# EAGLE board Muhammad Arya Widiantoro_Supply (Line Follower) (EAGLE 9.6.2)
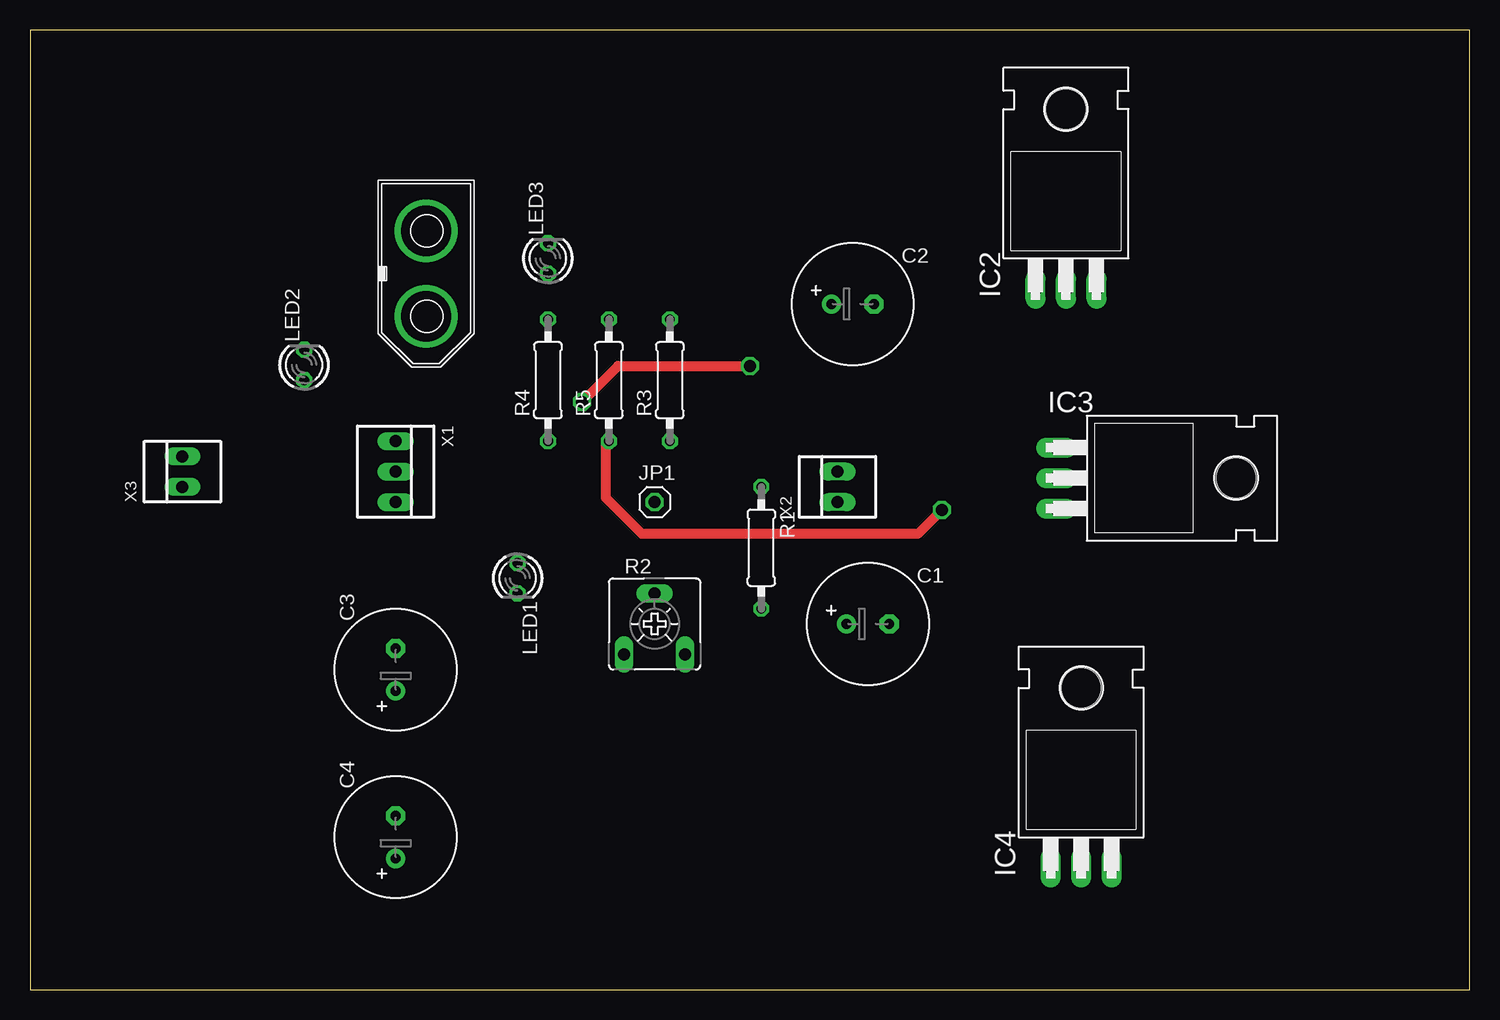
[diagram p0: board, top side]
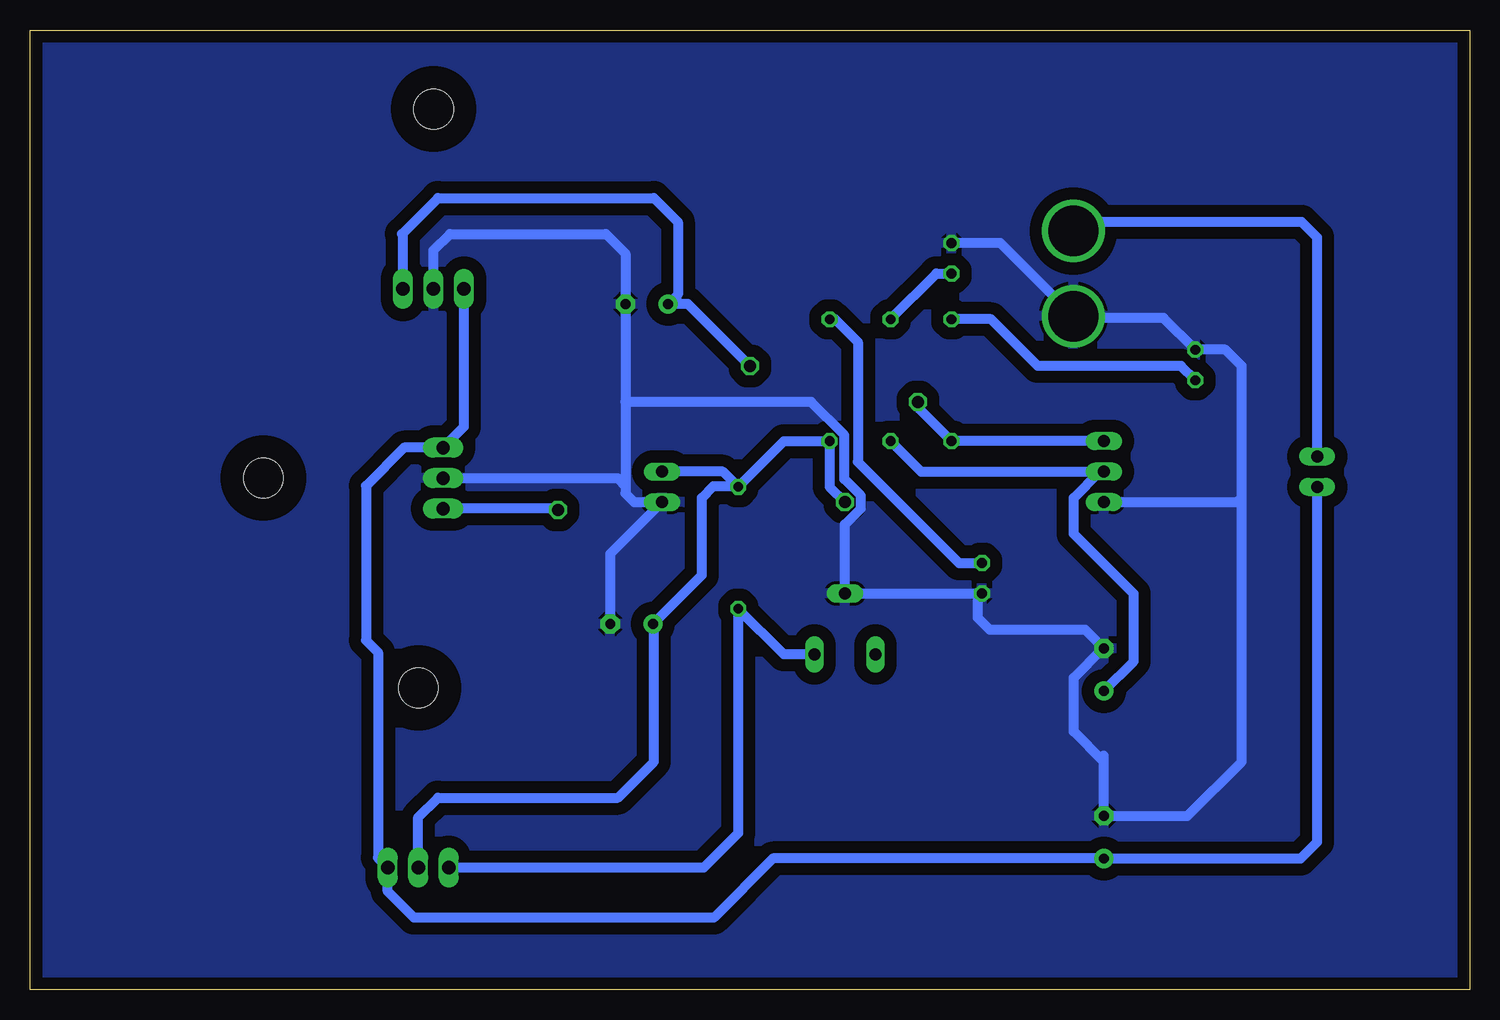
[diagram p1: board, bottom side, seen from below]

Size 120 x 80 mm. Coordinates in mm from the lower left corner, seen from the top.
Outline: 0,0 120,0 120,80 0,80 0,0
Copper layers (1*16): Top 0.035mm / dielectric 1.5mm / Bottom 0.035mm
Design rules "default": minimum track width 6mil, minimum drill 0.35mm, track to track 6mil, track to pad 6mil, pad to pad 6mil, via to via 6mil, smd to smd 6mil, copper to edge 40mil, drill to drill 6mil, minimum pad ring 10mil, minimum via ring 8mil, stop-mask expansion 4mil, vias tented up to drill 0mil, thermal gap 10mil

## Footprints (pad centres in the part's own frame; a part is rotated, then mirrored left to right if it is on the bottom)
E3,5-10 = drill 0.813 pad 1.6: + -1.778,0 | drill 0.813 pad 1.6 octagon: - 1.778,0
TO220H = drill 1.118 long: 1 -2.54,-10.16; 2 0,-10.16; 3 2.54,-10.16 | hole 3.302: 0,4.826
1X01 = drill 1.016 octagon: 1 0,0
LED3MM = drill 0.813 octagon: A -1.27,0; K 1.27,0
0207/10 = drill 0.813 octagon: 1 -5.08,0; 2 5.08,0
CA6V = drill 1.016 long: A -2.54,-2.54; E 2.54,-2.54; S 0,2.54
CON-XT60M = drill 4.2: V+ -3.55,0; V- 3.55,0
22-23-2031 = drill 1 long: 1 -2.54,0; 2 0,0; 3 2.54,0
22-23-2021 = drill 1 long: 1 -1.27,0; 2 1.27,0

## Placement (x,y rotation side)
C1  1000uF/16V  [E3,5-10]  69.85,30.48 0 top
C2  1000uF/16V  [E3,5-10]  68.58,57.15 0 top
C3  1000uF/16V  [E3,5-10]  30.48,26.67 90 top
C4  1000uF/16V  [E3,5-10]  30.48,12.7 90 top
IC2  7805T  [TO220H]  86.36,68.58 0 top
IC3  7805T  [TO220H]  95.72,42.64 270 top
IC4  317T  [TO220H]  87.63,20.32 0 top
JP1  [1X01]  52.07,40.64 0 top
LED1  [LED3MM]  40.64,34.29 270 top
LED2  [LED3MM]  22.86,52.07 90 top
LED3  [LED3MM]  43.18,60.96 90 top
R1  1K2  [0207/10]  60.96,36.83 270 top
R2  20K  [CA6V]  52.07,30.48 0 top
R3  1K  [0207/10]  53.34,50.8 90 top
R4  1K  [0207/10]  43.18,50.8 90 top
R5  1K  [0207/10]  48.26,50.8 90 top
VIN  [CON-XT60M]  33.02,59.69 270 top
X1  VSYS  [22-23-2031]  30.48,43.18 270 top
X2  VMOT  [22-23-2021]  67.31,41.91 90 top
X3  switch  [22-23-2021]  12.7,43.18 90 top

## Library data of the parts
C1-C4 R1 R3-R5 = rcl
IC2-IC4 = linear
JP1 = pinhead
LED1-LED3 = led
R2 = pot
VIN = con-XT60M
X1 = con-molex; MF: MOLEX; MPN: 22-23-2031; OC_FARNELL: 1462950; OC_NEWARK: 30C0862
X2 X3 = con-molex; MF: MOLEX; MPN: 22-23-2021; OC_FARNELL: 1462926; OC_NEWARK: 25C3832

## Nets
+12V: C3.+ IC3.3 R5.1 X1.2
GND: C1.- C2.- C3.- C4.- IC2.2 IC3.2 LED1.K LED2.K LED3.K R2.S VIN.V- X1.3 X2.1
N$1: IC4.1 R1.2 R2.E
N$2: LED1.A R3.2
N$3: LED3.A R5.2
N$4: VIN.V+ X3.2
N$5: LED2.A R4.2
VCC: C2.+ IC2.3 R4.1 X1.1
VDD: C1.+ IC4.2 JP1.1 R1.1 R3.1 X2.2
VPP: C4.+ IC2.1 IC3.1 IC4.3 X3.1

## Tracks (layer width: path | path; a pad name or v marks a point on that pad's centre or on a via)
+12V  (via drill 1)
  Top 0.813: v76,40 74,38 51,38 48,41 48,45.46 R5.1
  Bottom 0.813: 30.82,43.18 33,41 33,38 28,33 28,27.37 C3.+ | 30.82,43.18 X1.2 | R5.1 45.72,43.18 30.82,43.18 | IC3.3 76.1,40.1 v76,40
GND
  Bottom 0.813: 30.48,19 C4.- 23.52,14.48 19,19 19,41 | 30.48,19 30.48,19.52 | 19,41 19,52 20.34,53.34 LED2.K 25.52,56 34,56 34,57 33.88,57 VIN.V- 39.11,62.23 LED3.K | X1.3 19.36,40.64 19,41 | 30.48,19 33,21.52 33,26 30.55,28.45 C3.- 32.03,30 40,30 41,31 41,33 40.98,33.02 | 40.98,33.02 LED1.K | 40.98,33.02 R2.S 52.07,38.77 50.75,40.09 50.75,41.19 52.12,42.56 52.12,46.23 54.9,49 70.36,49 | IC2.2 86.36,61.64 85,63 72,63 70.36,61.36 C2.- 70.36,49 | 70.36,49 70.36,42 | 70.36,42 70.36,41.36 69.64,40.64 X2.1 71.63,36.32 C1.- | IC3.2 71,42.64 70.36,42
  pour Bottom (isolate 1.016): 0,80 0,0 120,0 120,80
N$1
  Bottom 0.813: R2.E 57.15,27.94 R1.2 60.96,13.04 63.84,10.16 IC4.1
N$2
  Bottom 0.813: R3.2 52.88,55.88 51,54 51,44 42.56,35.56 LED1.A
N$3
  Bottom 0.813: R5.2 44.45,59.69 LED3.A
N$4
  Bottom 0.813: X3.2 12.7,62.7 14,64 33,64 33.02,63.98 VIN.V+
N$5
  Bottom 0.813: LED2.A 24.06,52 36,52 39.88,55.88 R4.2
VCC  (via drill 1)
  Top 0.813: v46,49 49,52 v60,52
  Bottom 0.813: IC2.3 88.9,62.9 89,63 86,66 68,66 66,64 66,57.95 C2.+ 65.15,57.15 v60,52 | X1.1 R4.1 46,48.54 v46,49
VDD
  Bottom 0.813: IC4.2 87.63,14.37 86,16 71,16 68,19 68,30.41 C1.+ 64,34.55 64,41 63.02,41.98 61.02,41.98 | 61.02,41.98 R1.1 57.15,45.72 R3.1 53.34,41.91 JP1.1 | 61.02,41.98 62.23,43.18 X2.2
VPP
  Bottom 0.813: X3.1 12.7,12.3 14.08,10.92 C4.+ 58.08,10.92 63,6 88,6 90.17,8.17 IC4.3 91,10.99 91,28.11 92,29.11 92,42 88.82,45.18 IC3.1 83.82,46.92 IC2.1